# EAGLE board DCToACInverter_2Dpcb_schematic (EAGLE 9.7.0)
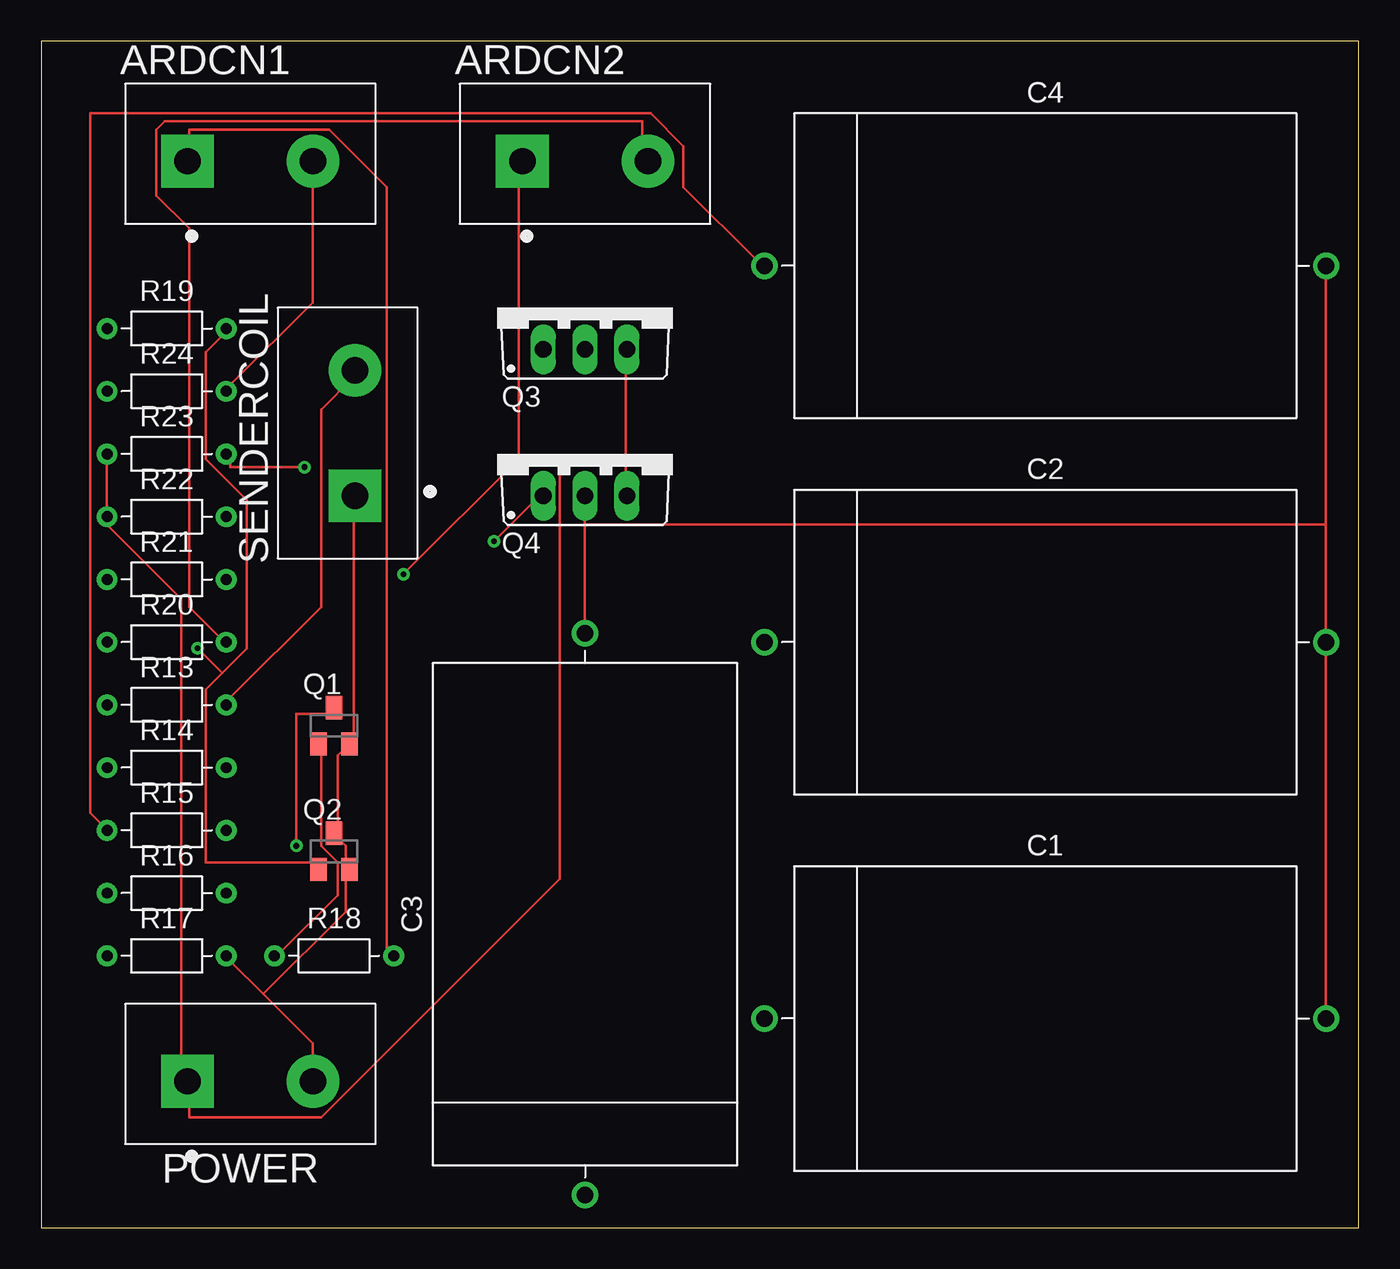
[diagram p0: board, top side]
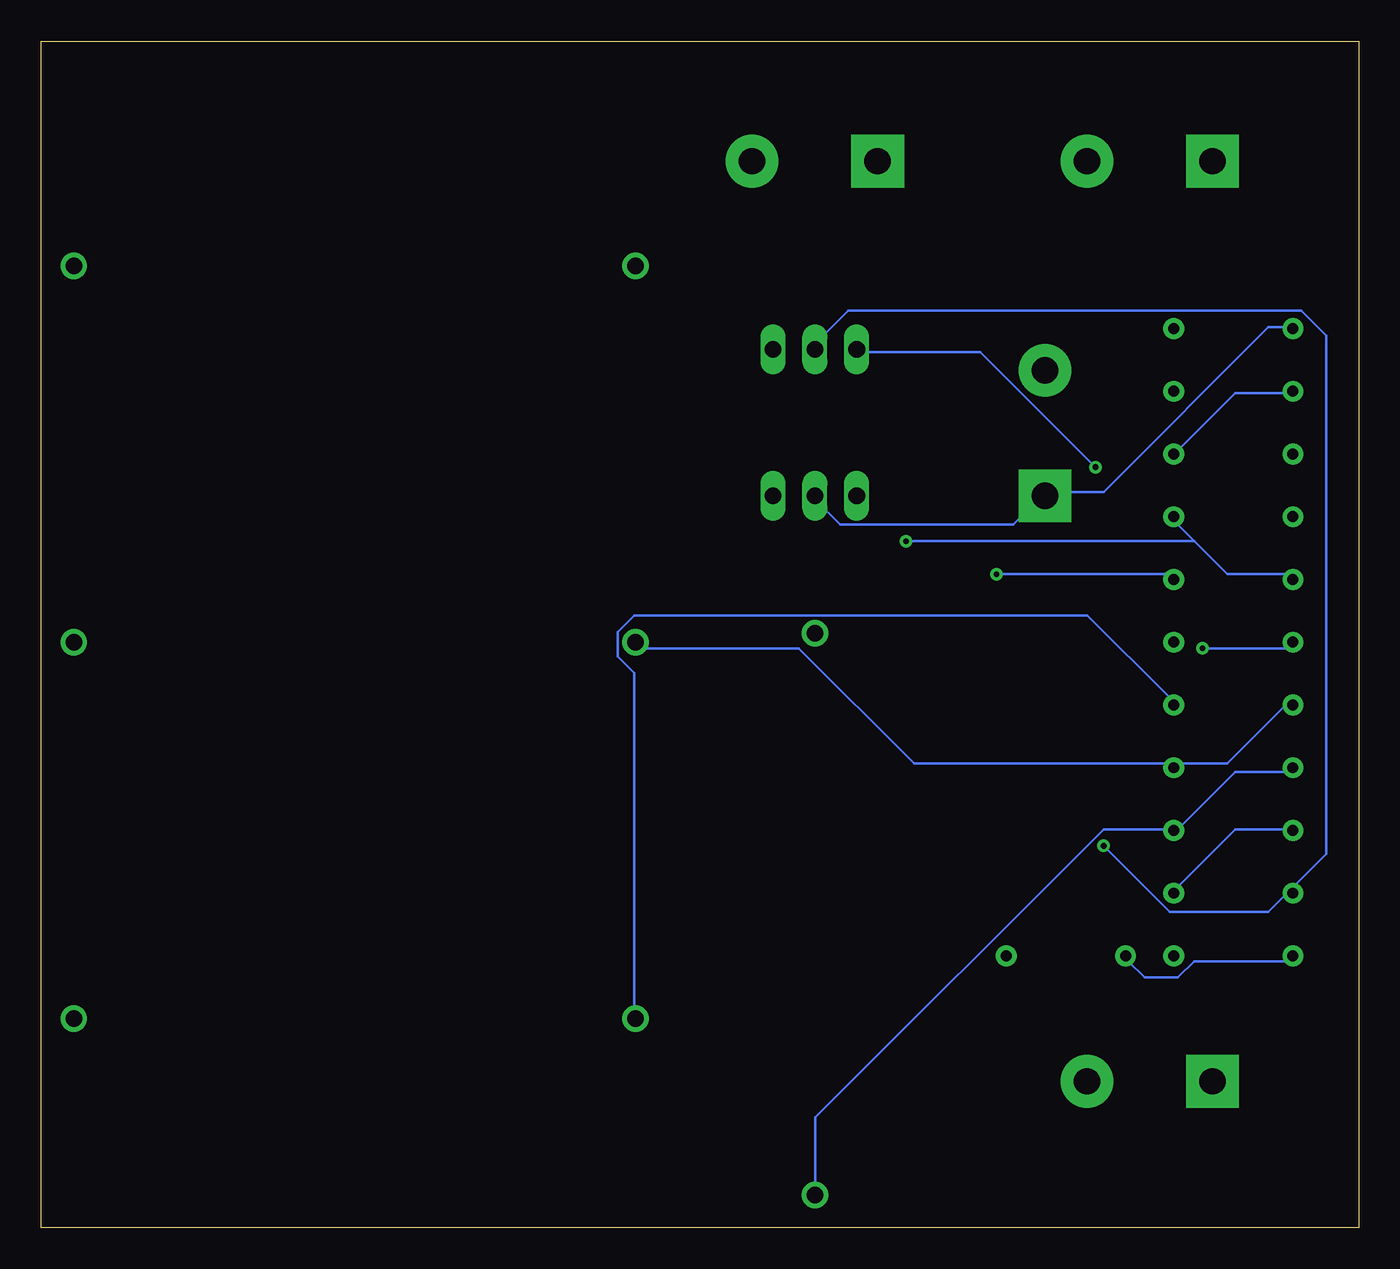
[diagram p1: board, bottom side, seen from below]

Size 79.99 x 72.06 mm. Coordinates in mm from the lower left corner, seen from the top.
Outline: 0,0 79.99,0 79.99,72.06 0,72.06 0,0
Copper layers (1*16): Top / Bottom
Stack-up Default Layer Stack: Top User Defined 0.035mm / Dielectric-1 User Defined 1.5mm / Bottom User Defined 0.035mm
Design rules "default": minimum track width 6mil, minimum drill 0.35mm, track to track 6mil, track to pad 6mil, pad to pad 6mil, via to via 6mil, smd to smd 6mil, copper to edge 40mil, drill to drill 6mil, minimum pad ring 10mil, minimum via ring 8mil, stop-mask expansion 4mil, vias tented up to drill 0mil, thermal gap 10mil

## Footprints (pad centres in the part's own frame; a part is rotated, then mirrored left to right if it is on the bottom)
TERMINALBLOCK_PLUGGABLE-2-7.62MM = drill 1.6 pad 3.2 square: 1 -3.81,0 | drill 1.6 pad 3.2: 2 3.81,0
CAPPAD3410W80L3025D1825B = drill 1 pad 1.6: 1 -17.05,0; 2 17.05,0
SOT23 = smd 1 x 1.4: 1 -0.95,-1.1; 2 0.95,-1.1; 3 0,1.1
TO220BV = drill 1.016 long: D 0,-2.54; G -2.54,-2.54; S 2.54,-2.54
RESAD724W46L381D178B = drill 0.66 pad 1.26: 1 -3.62,0; 2 3.62,0

## Placement (x,y rotation side)
ARDCN1  691311400102  [TERMINALBLOCK_PLUGGABLE-2-7.62MM]  12.7,64.77 0 top
ARDCN2  691311400102  [TERMINALBLOCK_PLUGGABLE-2-7.62MM]  33.02,64.77 0 top
C1  100nF  [CAPPAD3410W80L3025D1825B]  60.96,12.7 0 top
C2  100nF  [CAPPAD3410W80L3025D1825B]  60.96,35.56 0 top
C3  100nF  [CAPPAD3410W80L3025D1825B]  33.02,19.04 90 top
C4  100nF  [CAPPAD3410W80L3025D1825B]  60.96,58.42 0 top
POWER  691311400102  [TERMINALBLOCK_PLUGGABLE-2-7.62MM]  12.7,8.89 0 top
Q1  PMOSFET  [SOT23]  17.78,30.48 0 top
Q2  PMOSFET  [SOT23]  17.78,22.86 0 top
Q3  NMOSFET  [TO220BV]  33.02,55.88 0 top
Q4  NMOSFET  [TO220BV]  33.02,46.99 0 top
R13  200k  [RESAD724W46L381D178B]  7.62,31.75 0 top
R14  150k  [RESAD724W46L381D178B]  7.62,27.94 0 top
R15  100k  [RESAD724W46L381D178B]  7.62,24.13 0 top
R16  50k  [RESAD724W46L381D178B]  7.62,20.32 0 top
R17  100k  [RESAD724W46L381D178B]  7.62,16.51 0 top
R18  10k  [RESAD724W46L381D178B]  17.78,16.51 0 top
R19  100k  [RESAD724W46L381D178B]  7.62,54.61 0 top
R20  10k  [RESAD724W46L381D178B]  7.62,35.56 0 top
R21  10k  [RESAD724W46L381D178B]  7.62,39.37 0 top
R22  100k  [RESAD724W46L381D178B]  7.62,43.18 0 top
R23  100k  [RESAD724W46L381D178B]  7.62,46.99 0 top
R24  10k  [RESAD724W46L381D178B]  7.62,50.8 0 top
SENDERCOIL  691311400102  [TERMINALBLOCK_PLUGGABLE-2-7.62MM]  19.05,48.26 90 top

## Library data of the parts
ARDCN1 ARDCN2 POWER SENDERCOIL = Terminal Blocks; CREATED_BY: PCBLayout.com; DIGIKEY_PART_NO: 732-2823-ND; MANUFACTURER: WURTH ELEKTRONIK; MPN: 691311400102
C1-C4 = Capacitor; CATEGORY: Capacitor
Q1 Q2 = Transistor; CATEGORY: Transistor; SUB-CATEGORY: MOSFET; TYPE: P-Channel
Q3 Q4 = Transistor; CATEGORY: Transistor; SUB-CATEGORY: MOSFET; TYPE: N-Channel
R13-R24 = Resistor; CATEGORY: Resistor; SUB-CATEGORY: Fixed

## Nets
AGND: POWER.1 Q3.S Q4.S R22.1 R23.1
N$1: Q1.1 R17.1 R18.1
N$2: C1.1 R13.2 SENDERCOIL.2
N$3: Q2.1 R19.2 R20.1
N$4: C2.1 R13.1 R14.2
N$5: Q3.G R23.2 R24.1
N$6: C3.1 R14.1 R15.2
N$7: Q1.3 Q3.D R16.1
N$8: Q4.G R21.1 R22.2
N$9: C4.1 R15.1 R16.2
N$10: ARDCN2.2 R20.2
N$11: ARDCN2.1 R21.2
N$12: ARDCN1.1 R18.2
N$13: ARDCN1.2 R24.2
N$14: C1.2 C2.2 C3.2 C4.2 POWER.2 Q1.2 Q2.2 Q2.3 Q4.D R17.2 R19.1 SENDERCOIL.1

## Tracks (layer width: path | path; a pad name or v marks a point on that pad's centre or on a via)
AGND
  Top 0.152: 35.49,46.69 35.49,53.19 Q3.S | 35.49,46.69 35.49,44.69 Q4.S | R23.1 3.99,46.69 R22.1 3.99,42.69 8.49,38.19 8.49,9.19 POWER.1 8.99,8.69 8.99,6.69 16.99,6.69 31.49,21.19 31.49,46.69 35.49,46.69
N$1
  Top 0.152: Q1.1 16.99,29.19 16.99,23.19 17.99,22.19 17.99,20.19 14.49,16.69 R18.1
  Bottom 0.152: R17.1 4.49,16.19 9.99,16.19 10.99,15.19 12.99,15.19 13.99,16.19 R18.1
N$2
  Top 0.152: R13.2 11.49,32.19 16.99,37.69 16.99,49.69 18.99,51.69 SENDERCOIL.2
  Bottom 0.152: C1.1 43.99,13.19 43.99,33.69 44.99,34.69 44.99,36.19 43.99,37.19 16.49,37.19 11.49,32.19 R13.2
N$3  (via drill 0.35)
  Top 0.152: 10.99,33.69 12.49,35.19 12.49,44.19 9.99,46.69 9.99,53.19 10.99,54.19 R19.2 | 10.99,33.69 9.99,32.69 9.99,22.19 16.49,22.19 Q2.1 | 10.99,33.69 v9.49,35.19
  Bottom 0.152: v9.49,35.19 4.49,35.19 R20.1
N$4
  Bottom 0.152: R13.1 4.49,31.69 7.99,28.19 10.99,28.19 R14.2 11.49,28.19 26.99,28.19 33.99,35.19 43.49,35.19 C2.1
N$5  (via drill 0.35)
  Top 0.152: v15.99,46.19 11.49,46.19 11.49,46.69 R23.2
  Bottom 0.152: R24.1 4.49,50.69 7.49,50.69 10.99,47.19 R23.2 | v15.99,46.19 22.99,53.19 29.99,53.19 Q3.G
N$6
  Bottom 0.152: R14.1 4.49,27.69 7.49,27.69 10.99,24.19 R15.2 11.49,24.19 15.49,24.19 32.99,6.69 32.99,2.19 C3.1
N$7  (via drill 0.35)
  Top 0.152: v15.49,23.19 15.49,31.19 17.49,31.19 Q1.3
  Bottom 0.152: v15.49,23.19 11.49,19.19 5.49,19.19 4.49,20.19 R16.1 3.99,20.69 1.99,22.69 1.99,54.19 3.49,55.69 30.99,55.69 32.99,53.69 Q3.D
N$8  (via drill 0.35)
  Top 0.152: v27.49,41.69 29.99,44.19 Q4.G
  Bottom 0.152: 9.99,41.69 10.99,42.69 R22.2 | 9.99,41.69 7.99,39.69 4.49,39.69 R21.1 | 9.99,41.69 v27.49,41.69
N$9
  Top 0.152: C4.1 43.49,58.69 38.99,63.19 38.99,65.69 36.99,67.69 2.99,67.69 2.99,25.19 3.99,24.19 R15.1
  Bottom 0.152: R15.1 4.49,24.19 7.49,24.19 10.99,20.69 R16.2
N$10
  Top 0.152: R20.2 10.99,35.69 8.99,37.69 8.99,60.69 6.99,62.69 6.99,66.69 7.49,67.19 36.49,67.19 36.49,65.19 ARDCN2.2
N$11  (via drill 0.35)
  Top 0.152: v21.99,39.69 28.99,46.69 28.99,64.69 ARDCN2.1
  Bottom 0.152: v21.99,39.69 11.49,39.69 R21.2
N$12
  Top 0.152: R18.2 20.99,16.69 20.99,63.19 17.49,66.69 8.99,66.69 8.99,65.19 ARDCN1.1
N$13
  Top 0.152: R24.2 11.49,51.19 16.49,56.19 16.49,64.69 ARDCN1.2
N$14
  Top 0.152: C1.2 77.99,13.19 77.99,35.19 C2.2 77.99,35.69 77.99,42.69 | 77.99,42.69 77.99,58.19 C4.2 | 13.49,14.19 16.49,11.19 16.49,9.19 POWER.2 | 13.49,14.19 11.49,16.19 R17.2 | 32.99,42.69 32.99,36.19 C3.2 | 32.99,42.69 32.99,44.19 Q4.D | SENDERCOIL.1 18.99,44.19 18.99,29.69 Q1.2 18.49,29.19 17.99,28.69 17.99,24.19 Q2.3 17.99,23.69 18.49,23.19 18.49,22.19 Q2.2 18.49,21.69 18.49,19.19 13.49,14.19 | 32.99,42.69 77.99,42.69
  Bottom 0.152: R19.1 4.49,54.69 5.49,54.69 15.49,44.69 18.99,44.69 SENDERCOIL.1 19.49,44.19 20.99,42.69 31.49,42.69 32.99,44.19 Q4.D